# EAGLE board untitled_panelized (EAGLE 9.5.0)
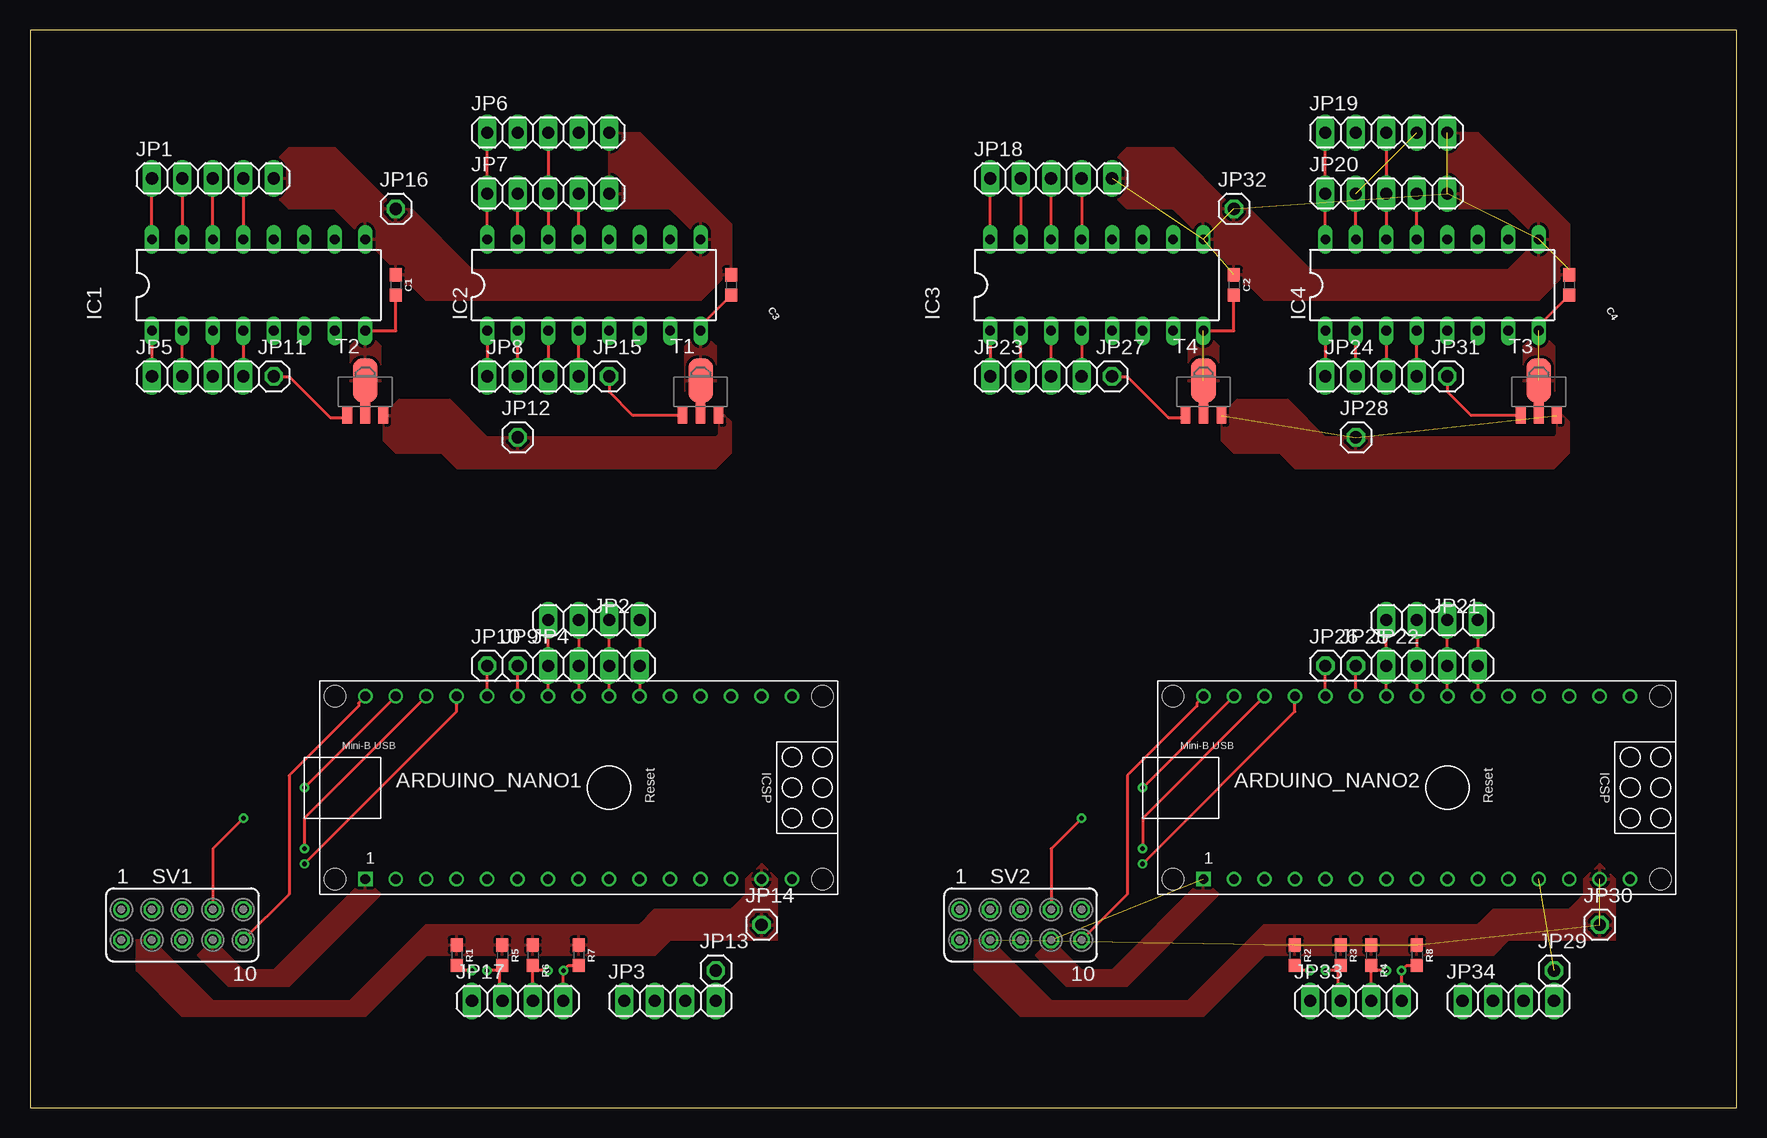
[diagram p0: board, top side]
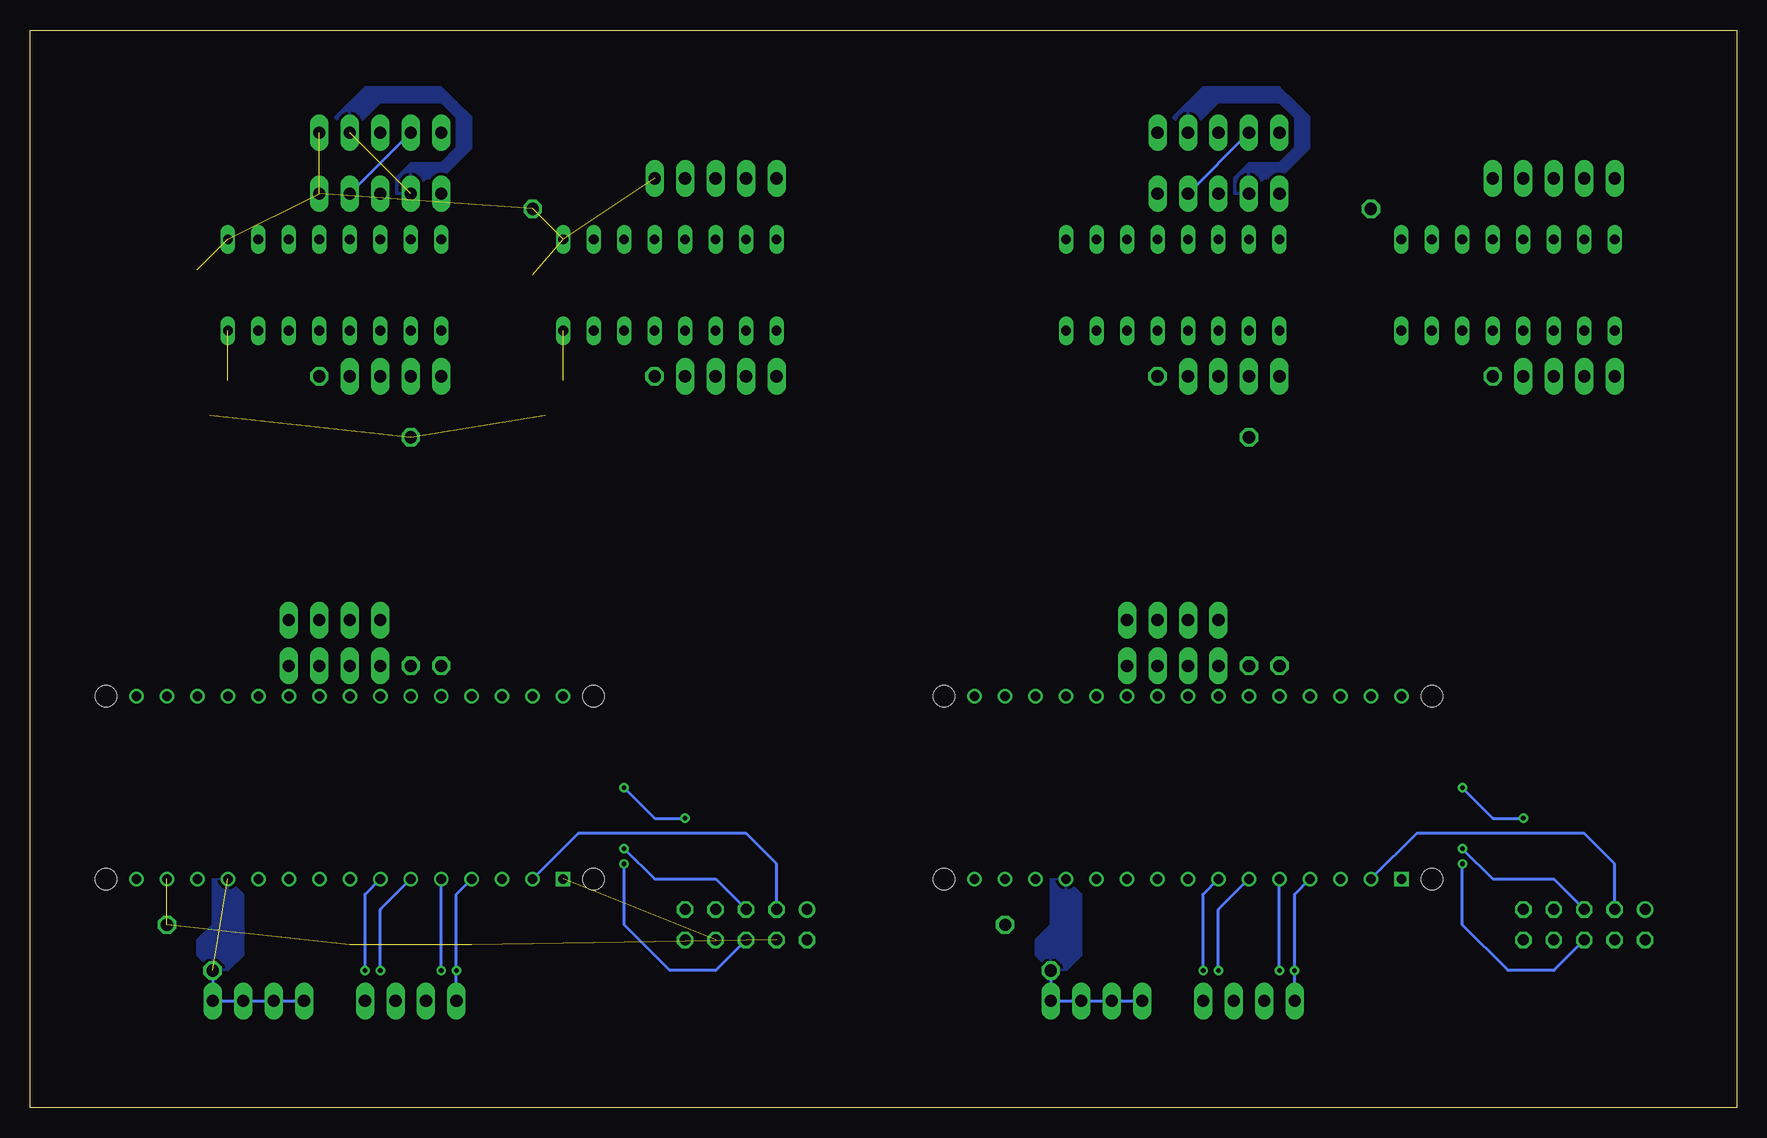
[diagram p1: board, bottom side, seen from below]

Size 142.22 x 89.84 mm. Coordinates in mm from the lower left corner, seen from the top.
Outline: 0,0 142.22,0 142.22,89.84 0,89.84 0,0
Copper layers (1*16): Top 0.035mm / dielectric 1.5mm / Bottom 0.035mm
Design rules "Standard": minimum track width 10mil, minimum drill 15mil, track to track 10mil, track to pad 10mil, pad to pad 10mil, via to via 10mil, smd to smd 10mil, copper to edge 20mil, drill to drill 10mil, minimum pad ring 8mil, minimum via ring 8mil, stop-mask expansion 4mil, vias tented up to drill 0mil, thermal gap 10mil

## Footprints (pad centres in the part's own frame; a part is rotated, then mirrored left to right if it is on the bottom)
ARDUINO_NANO = drill 0.8 square: 1 -20.32,-7.62 | drill 0.8: 2 -17.78,-7.62; 3 -15.24,-7.62; 4 -12.7,-7.62; 5 -10.16,-7.62; 6 -7.62,-7.62; 7 -5.08,-7.62; 8 -2.54,-7.62; 9 0,-7.62; 10 2.54,-7.62; 11 5.08,-7.62; 12 7.62,-7.62; 13 10.16,-7.62; 14 12.7,-7.62; 15 15.24,-7.62; 16 15.24,7.62; 17 12.7,7.62; 18 10.16,7.62; 19 7.62,7.62; 20 5.08,7.62; 21 2.54,7.62; 22 0,7.62; 23 -2.54,7.62; 24 -5.08,7.62; 25 -7.62,7.62; 26 -10.16,7.62; 27 -12.7,7.62; 28 -15.24,7.62; 29 -17.78,7.62; 30 -20.32,7.62 | hole 1.778: -22.86,-7.62; -22.86,7.62; 17.78,7.62; 17.78,-7.62
0603 = smd 1.1 x 1: 1 -0.85,0; 2 0.85,0
DIL16 = drill 0.813 long: 1 -8.89,-3.81; 2 -6.35,-3.81; 3 -3.81,-3.81; 4 -1.27,-3.81; 5 1.27,-3.81; 6 3.81,-3.81; 7 6.35,-3.81; 8 8.89,-3.81; 9 8.89,3.81; 10 6.35,3.81; 11 3.81,3.81; 12 1.27,3.81; 13 -1.27,3.81; 14 -3.81,3.81; 15 -6.35,3.81; 16 -8.89,3.81
1X05 = drill 1.016 long: 1 -5.08,0; 2 -2.54,0; 3 0,0; 4 2.54,0; 5 5.08,0
1X04 = drill 1.016 long: 1 -3.81,0; 2 -1.27,0; 3 1.27,0; 4 3.81,0
1X01 = drill 1.016 octagon: 1 0,0
FE05-2 = drill 0.914: 1 -5.08,1.27 | drill 0.914 octagon: 2 -5.08,-1.27; 3 -2.54,1.27; 4 -2.54,-1.27; 5 0,1.27; 6 0,-1.27; 7 2.54,1.27; 8 2.54,-1.27; 9 5.08,1.27; 10 5.08,-1.27
SOT89 = smd 0.8 x 1.4: 1 -1.499,-1.981; 3 1.499,-1.981 | smd 0.8 x 1.9: 2 0,-1.727 | smd 2.032 x 3.65: 2@1 0,0.94

## Placement (x,y rotation side)
ARDUINO_NANO1  [ARDUINO_NANO]  48.26,26.67 0 top
ARDUINO_NANO2  [ARDUINO_NANO]  118.11,26.67 0 top
C1  1nF  [0603]  30.48,68.58 270 top
C2  1nF  [0603]  100.33,68.58 270 top
C3  1nF  [0603]  58.42,68.58 270 top
C4  1nF  [0603]  128.27,68.58 270 top
IC1  ULN2003AN  [DIL16]  19.05,68.58 0 top
IC2  ULN2003AN  [DIL16]  46.99,68.58 0 top
IC3  ULN2003AN  [DIL16]  88.9,68.58 0 top
IC4  ULN2003AN  [DIL16]  116.84,68.58 0 top
JP1  [1X05]  15.24,77.47 0 top
JP2  [1X04]  46.99,40.64 0 top
JP3  [1X04]  53.34,8.89 0 top
JP4  [1X04]  46.99,36.83 0 top
JP5  [1X04]  13.97,60.96 0 top
JP6  [1X05]  43.18,81.28 0 top
JP7  [1X05]  43.18,76.2 0 top
JP8  [1X04]  41.91,60.96 0 top
JP9  [1X01]  40.64,36.83 0 top
JP10  [1X01]  38.1,36.83 0 top
JP11  [1X01]  20.32,60.96 0 top
JP12  [1X01]  40.64,55.88 0 top
JP13  [1X01]  57.15,11.43 0 top
JP14  [1X01]  60.96,15.24 0 top
JP15  [1X01]  48.26,60.96 0 top
JP16  [1X01]  30.48,74.93 0 top
JP17  [1X04]  40.64,8.89 0 top
JP18  [1X05]  85.09,77.47 0 top
JP19  [1X05]  113.03,81.28 0 top
JP20  [1X05]  113.03,76.2 0 top
JP21  [1X04]  116.84,40.64 0 top
JP22  [1X04]  116.84,36.83 0 top
JP23  [1X04]  83.82,60.96 0 top
JP24  [1X04]  111.76,60.96 0 top
JP25  [1X01]  110.49,36.83 0 top
JP26  [1X01]  107.95,36.83 0 top
JP27  [1X01]  90.17,60.96 0 top
JP28  [1X01]  110.49,55.88 0 top
JP29  [1X01]  127,11.43 0 top
JP30  [1X01]  130.81,15.24 0 top
JP31  [1X01]  118.11,60.96 0 top
JP32  [1X01]  100.33,74.93 0 top
JP33  [1X04]  110.49,8.89 0 top
JP34  [1X04]  123.19,8.89 0 top
R1  100k  [0603]  35.56,12.7 270 top
R2  100k  [0603]  105.41,12.7 270 top
R3  100k  [0603]  109.22,12.7 270 top
R4  100k  [0603]  111.76,12.7 270 top
R5  100k  [0603]  39.37,12.7 270 top
R6  100k  [0603]  41.91,12.7 270 top
R7  100k  [0603]  45.72,12.7 270 top
R8  100k  [0603]  115.57,12.7 270 top
SV1  [FE05-2]  12.7,15.24 0 top
SV2  [FE05-2]  82.55,15.24 0 top
T1  [SOT89]  55.88,59.69 0 top
T2  [SOT89]  27.94,59.69 0 top
T3  [SOT89]  125.73,59.69 0 top
T4  [SOT89]  97.79,59.69 0 top

## Library data of the parts
ARDUINO_NANO1 ARDUINO_NANO2 = ArduinoNanoV30
C1-C4 = SparkFun-Capacitors; PROD_ID: CAP-07886
IC1-IC4 = uln-udn; A: One of two available
JP1-JP34 = pinhead
R1-R8 = SparkFun-Resistors; PROD_ID: RES-07828
SV1 SV2 = con-lsta; OC_FARNELL: unknown; OC_NEWARK: unknown
T1-T4 = zetex; OC_FARNELL: unknown; OC_NEWARK: unknown

## Nets
3V1: ARDUINO_NANO2.1 SV2.8
3V3: ARDUINO_NANO1.1 SV1.8
GND: ARDUINO_NANO1.19
GND1: ARDUINO_NANO1.14 JP14.1 R1.1 R5.1 R6.1 R7.1 SV1.4
GND2: JP12.1 T1.3 T2.3
GND3: ARDUINO_NANO2.19
GND4: ARDUINO_NANO2.14 JP30.1 R2.1 R3.1 R4.1 R8.1 SV2.4
GND5: JP28.1 T3.3 T4.3
LONGTHINGY: IC2.15 JP6.4 JP7.2
LONGTHINGY1: IC4.15 JP19.4 JP20.2
N$1: ARDUINO_NANO1.4 JP17.1 R1.2
N$2: ARDUINO_NANO2.4 JP33.1 R2.2
N$3: ARDUINO_NANO1.21 JP2.4 JP4.4
N$4: ARDUINO_NANO1.30 SV1.10
N$5: IC4.16 JP19.1 JP20.1
N$6: IC2.16 JP6.1 JP7.1
N$7: IC4.14 JP19.3 JP20.3
N$8: IC2.14 JP6.3 JP7.3
N$9: IC2.13 JP6.2 JP7.4
N$10: IC4.13 JP19.2 JP20.4
N$11: IC1.16 JP1.1
N$12: IC1.15 JP1.2
N$13: IC1.14 JP1.3
N$14: IC1.13 JP1.4
N$15: ARDUINO_NANO1.22 JP2.3 JP4.3
N$16: IC3.16 JP18.1
N$17: ARDUINO_NANO1.25 JP9.1
N$18: ARDUINO_NANO1.23 JP2.2 JP4.2
N$19: IC3.15 JP18.2
N$20: IC3.14 JP18.3
N$21: ARDUINO_NANO1.29 SV1.7
N$22: ARDUINO_NANO1.28 SV1.5
N$23: ARDUINO_NANO1.27 SV1.6
N$24: ARDUINO_NANO1.24 JP2.1 JP4.1
N$25: ARDUINO_NANO1.2 SV1.3
N$26: IC3.13 JP18.4
N$27: IC1.1 JP5.1
N$28: IC1.2 JP5.2
N$29: IC1.3 JP5.3
N$30: IC1.4 JP5.4
N$31: IC2.1 JP8.1
N$32: IC2.2 JP8.2
N$33: IC2.3 JP8.3
N$34: IC2.4 JP8.4
N$35: ARDUINO_NANO1.26 JP10.1
N$36: JP11.1 T2.1
N$37: JP15.1 T1.1
N$38: ARDUINO_NANO2.30 SV2.10
N$39: ARDUINO_NANO1.5 JP17.2 R5.2
N$40: ARDUINO_NANO1.6 JP17.3 R6.2
N$41: ARDUINO_NANO1.7 JP17.4 R7.2
N$42: ARDUINO_NANO2.29 SV2.7
N$43: ARDUINO_NANO2.28 SV2.5
N$44: ARDUINO_NANO2.27 SV2.6
N$45: ARDUINO_NANO2.2 SV2.3
N$46: ARDUINO_NANO2.21 JP21.4 JP22.4
N$47: ARDUINO_NANO2.22 JP21.3 JP22.3
N$48: ARDUINO_NANO2.23 JP21.2 JP22.2
N$49: ARDUINO_NANO2.24 JP21.1 JP22.1
N$50: IC3.1 JP23.1
N$51: IC3.2 JP23.2
N$52: IC3.3 JP23.3
N$53: IC3.4 JP23.4
N$54: IC4.1 JP24.1
N$55: IC4.2 JP24.2
N$56: IC4.3 JP24.3
N$57: IC4.4 JP24.4
N$58: ARDUINO_NANO2.25 JP25.1
N$59: ARDUINO_NANO2.26 JP26.1
N$60: JP27.1 T4.1
N$61: JP31.1 T3.1
N$62: ARDUINO_NANO2.5 JP33.2 R3.2
N$63: ARDUINO_NANO2.6 JP33.3 R4.2
N$64: ARDUINO_NANO2.7 JP33.4 R8.2
ULN1GND: C1.2 IC1.8 T2.2 T2.2@1
ULN1GND1: C2.2 IC3.8 T4.2 T4.2@1
ULN2GND: C3.2 IC2.8 T1.2 T1.2@1
ULN2GND1: C4.2 IC4.8 T3.2 T3.2@1
VCC1: ARDUINO_NANO1.12 JP3.1 JP3.2 JP3.3 JP3.4 JP13.1
VCC2: C1.1 C3.1 IC1.9 IC2.9 JP1.5 JP6.5 JP7.5 JP16.1
VCC3: C2.1 C4.1 IC3.9 IC4.9 JP18.5 JP19.5 JP20.5 JP32.1
VCC4: ARDUINO_NANO2.12 JP29.1 JP34.1 JP34.2 JP34.3 JP34.4
VIN: ARDUINO_NANO1.15
VIN1: ARDUINO_NANO2.15

## Tracks (layer width: path | path; a pad name or v marks a point on that pad's centre or on a via)
3V1  (1 unrouted)
  pour Top: 97.79,19.05 90.17,11.43 87.63,11.43 85.09,13.97 83.82,12.7 86.36,10.16 91.44,10.16 99.06,17.78
3V3
  pour Top: 27.94,19.05 20.32,11.43 17.78,11.43 15.24,13.97 13.97,12.7 16.51,10.16 21.59,10.16 29.21,17.78
GND1
  pour Top (isolate 0.254): 12.7,7.62 8.89,11.43 8.89,13.97 10.16,13.97 15.24,8.89 26.67,8.89 33.02,15.24 50.8,15.24 52.07,16.51 58.42,16.51 59.69,17.78 59.69,19.05 60.96,20.32 62.23,19.05 62.23,13.97 53.34,13.97 52.07,12.7 33.02,12.7 27.94,7.62
GND2
  pour Top: 29.44,57.71 29.44,55.65 30.48,54.61 34.29,54.61 35.56,53.34 57.15,53.34 58.42,54.61 58.42,57.15 57.86,57.71 57.38,57.71 57.38,56.11 57.15,55.88 38.1,55.88 35,58.98 30.71,58.98
GND4  (6 unrouted)
  pour Top (isolate 0.254): 82.55,7.62 78.74,11.43 78.74,13.97 80.01,13.97 85.09,8.89 96.52,8.89 102.87,15.24 120.65,15.24 121.92,16.51 128.27,16.51 129.54,17.78 129.54,19.05 130.81,20.32 132.08,19.05 132.08,13.97 123.19,13.97 121.92,12.7 102.87,12.7 97.79,7.62
GND5  (2 unrouted)
  pour Top: 99.29,57.71 99.29,55.65 100.33,54.61 104.14,54.61 105.41,53.34 127,53.34 128.27,54.61 128.27,57.15 127.71,57.71 127.23,57.71 127.23,56.11 127,55.88 107.95,55.88 104.85,58.98 100.56,58.98
LONGTHINGY
  Top 0.254: IC2.15 JP7.2
  pour Bottom: 45.72,81.28 44.45,82.55 43.18,83.82 38.1,83.82 36.83,82.55 36.83,81.28 36.83,80.01 38.1,78.74 40.64,78.74 41.91,77.47 41.91,76.2 40.64,76.2 39.37,77.47 38.1,77.47 35.56,80.01 35.56,82.55 36.83,83.82 38.1,85.09 43.18,85.09 44.45,85.09 46.99,82.55
LONGTHINGY1  (1 unrouted)
  Top 0.254: IC4.15 JP20.2
  pour Bottom: 115.57,81.28 114.3,82.55 113.03,83.82 107.95,83.82 106.68,82.55 106.68,81.28 106.68,80.01 107.95,78.74 110.49,78.74 111.76,77.47 111.76,76.2 110.49,76.2 109.22,77.47 107.95,77.47 105.41,80.01 105.41,82.55 106.68,83.82 107.95,85.09 113.03,85.09 114.3,85.09 116.84,82.55
N$1  (via drill 0.38)
  Top 0.254: v36.83,11.43 35.98,11.43 R1.2
  Bottom 0.254: JP17.1 v36.83,11.43 36.83,17.78 ARDUINO_NANO1.4
N$2  (via drill 0.38)
  Top 0.254: v106.68,11.43 105.83,11.43 R2.2
  Bottom 0.254: JP33.1 v106.68,11.43 106.68,17.78 ARDUINO_NANO2.4
N$3
  Top 0.254: JP2.4 JP4.4 ARDUINO_NANO1.21
N$4
  Top 0.254: ARDUINO_NANO1.30 27.38,33.73 27.38,33.47 21.59,27.68 21.59,17.78 SV1.10
N$5
  Top 0.254: IC4.16 JP20.1 JP19.1
N$6
  Top 0.254: IC2.16 JP7.1 JP6.1
N$7
  Top 0.254: JP19.3 IC4.14 JP20.3
N$8
  Top 0.254: JP6.3 IC2.14 JP7.3
N$9
  Top 0.254: IC2.13 JP7.4
  Bottom 0.254: JP7.4 JP6.2
N$10
  Top 0.254: IC4.13 JP20.4
  Bottom 0.254: JP20.4 JP19.2
N$11
  Top 0.254: IC1.16 JP1.1
N$12
  Top 0.254: JP1.2 IC1.15
N$13
  Top 0.254: IC1.14 JP1.3
N$14
  Top 0.254: JP1.4 IC1.13
N$15
  Top 0.254: ARDUINO_NANO1.22 JP4.3 JP2.3
N$16
  Top 0.254: IC3.16 JP18.1
N$17
  Top 0.254: ARDUINO_NANO1.25 JP9.1
N$18
  Top 0.254: JP2.2 JP4.2 ARDUINO_NANO1.23
N$19
  Top 0.254: JP18.2 IC3.15
N$20
  Top 0.254: IC3.14 JP18.3
N$21  (via drill 0.38)
  Top 0.254: ARDUINO_NANO1.29 v22.86,26.67 | v17.78,24.13 15.24,21.59 SV1.7
  Bottom 0.254: v22.86,26.67 20.32,24.13 v17.78,24.13
N$22  (via drill 0.38)
  Top 0.254: ARDUINO_NANO1.28 22.86,24.13 v22.86,21.59
  Bottom 0.254: v22.86,21.59 20.32,19.05 15.24,19.05 SV1.5
N$23  (via drill 0.38)
  Top 0.254: v22.86,20.32 35.56,33.02 ARDUINO_NANO1.27
  Bottom 0.254: SV1.6 15.24,11.43 19.05,11.43 22.86,15.24 v22.86,20.32
N$24
  Top 0.254: ARDUINO_NANO1.24 JP4.1 JP2.1
N$25
  Bottom 0.254: SV1.3 10.16,20.32 12.7,22.86 26.67,22.86 ARDUINO_NANO1.2
N$26
  Top 0.254: JP18.4 IC3.13
N$27
  Top 0.254: IC1.1 JP5.1
N$28
  Top 0.254: JP5.2 IC1.2
N$29
  Top 0.254: JP5.3 IC1.3
N$30
  Top 0.254: IC1.4 JP5.4
N$31
  Top 0.254: IC2.1 JP8.1
N$32
  Top 0.254: JP8.2 IC2.2
N$33
  Top 0.254: IC2.3 JP8.3
N$34
  Top 0.254: JP8.4 IC2.4
N$35
  Top 0.254: ARDUINO_NANO1.26 JP10.1
N$36
  Top 0.254: T2.1 26.28,57.54 25.01,57.54 21.59,60.96 JP11.1
N$37
  Top 0.254: T1.1 50.24,57.71 48.26,59.69 JP15.1
N$38
  Top 0.254: ARDUINO_NANO2.30 97.23,33.73 97.23,33.47 91.44,27.68 91.44,17.78 SV2.10
N$39  (via drill 0.38)
  Top 0.254: 39.16,11.64 38.95,11.43 v38.1,11.43 | JP17.2 39.16,9.1 39.16,11.64 | R5.2 39.16,11.64
  Bottom 0.254: v38.1,11.43 ARDUINO_NANO1.5
N$40  (via drill 0.38)
  Top 0.254: JP17.3 41.91,11.43 42.12,11.64 | v43.18,11.43 42.33,11.43 42.12,11.64 | R6.2 42.12,11.64
  Bottom 0.254: v43.18,11.43 43.18,16.51 ARDUINO_NANO1.6
N$41  (via drill 0.38)
  Top 0.254: JP17.4 v44.45,11.43 44.87,11.85 R7.2
  Bottom 0.254: v44.45,11.43 44.45,17.78 ARDUINO_NANO1.7
N$42  (via drill 0.38)
  Top 0.254: ARDUINO_NANO2.29 v92.71,26.67 | v87.63,24.13 85.09,21.59 SV2.7
  Bottom 0.254: v92.71,26.67 90.17,24.13 v87.63,24.13
N$43  (via drill 0.38)
  Top 0.254: ARDUINO_NANO2.28 92.71,24.13 v92.71,21.59
  Bottom 0.254: v92.71,21.59 90.17,19.05 85.09,19.05 SV2.5
N$44  (via drill 0.38)
  Top 0.254: v92.71,20.32 105.41,33.02 ARDUINO_NANO2.27
  Bottom 0.254: SV2.6 85.09,11.43 88.9,11.43 92.71,15.24 v92.71,20.32
N$45
  Bottom 0.254: SV2.3 80.01,20.32 82.55,22.86 96.52,22.86 ARDUINO_NANO2.2
N$46
  Top 0.254: JP21.4 JP22.4 ARDUINO_NANO2.21
N$47
  Top 0.254: ARDUINO_NANO2.22 JP22.3 JP21.3
N$48
  Top 0.254: JP21.2 JP22.2 ARDUINO_NANO2.23
N$49
  Top 0.254: ARDUINO_NANO2.24 JP22.1 JP21.1
N$50
  Top 0.254: IC3.1 JP23.1
N$51
  Top 0.254: JP23.2 IC3.2
N$52
  Top 0.254: JP23.3 IC3.3
N$53
  Top 0.254: IC3.4 JP23.4
N$54
  Top 0.254: IC4.1 JP24.1
N$55
  Top 0.254: JP24.2 IC4.2
N$56
  Top 0.254: IC4.3 JP24.3
N$57
  Top 0.254: JP24.4 IC4.4
N$58
  Top 0.254: ARDUINO_NANO2.25 JP25.1
N$59
  Top 0.254: ARDUINO_NANO2.26 JP26.1
N$60
  Top 0.254: T4.1 96.13,57.54 94.86,57.54 91.44,60.96 JP27.1
N$61
  Top 0.254: T3.1 120.09,57.71 118.11,59.69 JP31.1
N$62  (via drill 0.38)
  Top 0.254: 109.01,11.64 108.8,11.43 v107.95,11.43 | JP33.2 109.01,9.1 109.01,11.64 | R3.2 109.01,11.64
  Bottom 0.254: v107.95,11.43 ARDUINO_NANO2.5
N$63  (via drill 0.38)
  Top 0.254: JP33.3 111.76,11.43 111.97,11.64 | v113.03,11.43 112.18,11.43 111.97,11.64 | R4.2 111.97,11.64
  Bottom 0.254: v113.03,11.43 113.03,16.51 ARDUINO_NANO2.6
N$64  (via drill 0.38)
  Top 0.254: JP33.4 v114.3,11.43 114.72,11.85 R8.2
  Bottom 0.254: v114.3,11.43 114.3,17.78 ARDUINO_NANO2.7
ULN1GND
  Top 0.254: IC1.8 30.48,64.77 C1.2
  pour Top: 27.94,64.77 26.67,63.5 26.67,59.69 27.94,58.42 29.21,59.69 29.21,63.5
ULN1GND1  (1 unrouted)
  Top 0.254: IC3.8 100.33,64.77 C2.2
  pour Top: 97.79,64.77 96.52,63.5 96.52,59.69 97.79,58.42 99.06,59.69 99.06,63.5
ULN2GND
  Top 0.254: C3.2 55.88,65.19 IC2.8
  pour Top: 55.88,58.42 54.61,59.69 54.61,63.5 55.88,64.77 57.15,63.5 57.15,59.69
ULN2GND1  (1 unrouted)
  Top 0.254: C4.2 125.73,65.19 IC4.8
  pour Top: 125.73,58.42 124.46,59.69 124.46,63.5 125.73,64.77 127,63.5 127,59.69
VCC1
  Bottom 0.254: JP13.1 JP3.4 JP3.3 JP3.2 JP3.1
  pour Bottom: 55.88,19.05 54.61,17.78 54.61,12.7 55.88,11.43 57.15,11.43 58.42,12.7 58.42,13.97 57.15,15.24 57.15,19.05
VCC2
  Top 0.254: 58.42,69.85 C3.1
  pour Top: 21.59,74.93 20.32,76.2 20.32,78.74 21.59,80.01 25.4,80.01 30.48,74.93 31.75,74.93 36.83,69.85 53.34,69.85 55.88,72.39 53.34,74.93 48.26,74.93 48.26,81.28 50.8,81.28 58.42,73.66 58.42,69.85 55.88,67.31 33.02,67.31 31.75,68.58 31.33,68.58 30.48,69.43 30.48,69.85 25.4,74.93
VCC3  (7 unrouted)
  Top 0.254: 128.27,69.85 C4.1
  pour Top: 91.44,74.93 90.17,76.2 90.17,78.74 91.44,80.01 95.25,80.01 100.33,74.93 101.6,74.93 106.68,69.85 123.19,69.85 125.73,72.39 123.19,74.93 118.11,74.93 118.11,81.28 120.65,81.28 128.27,73.66 128.27,69.85 125.73,67.31 102.87,67.31 101.6,68.58 101.18,68.58 100.33,69.43 100.33,69.85 95.25,74.93
VCC4  (1 unrouted)
  Bottom 0.254: JP29.1 JP34.4 JP34.3 JP34.2 JP34.1
  pour Bottom: 125.73,19.05 124.46,17.78 124.46,12.7 125.73,11.43 127,11.43 128.27,12.7 128.27,13.97 127,15.24 127,19.05